# EAGLE board ENERGIS_DispBrd_Rack-PDU_1.0.3 (EAGLE 9.2.1)
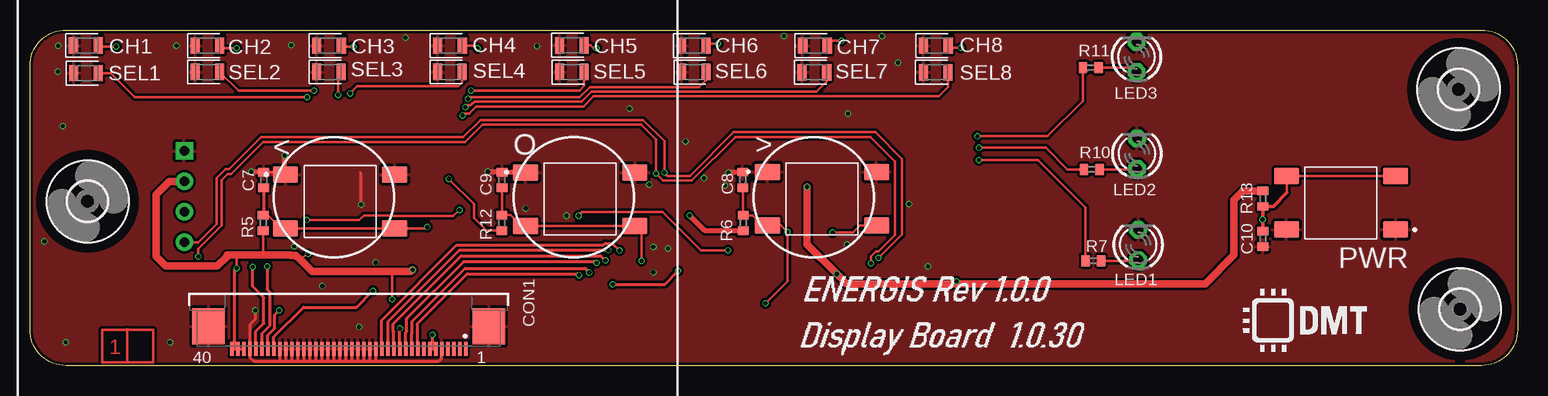
[diagram p0: board, top side]
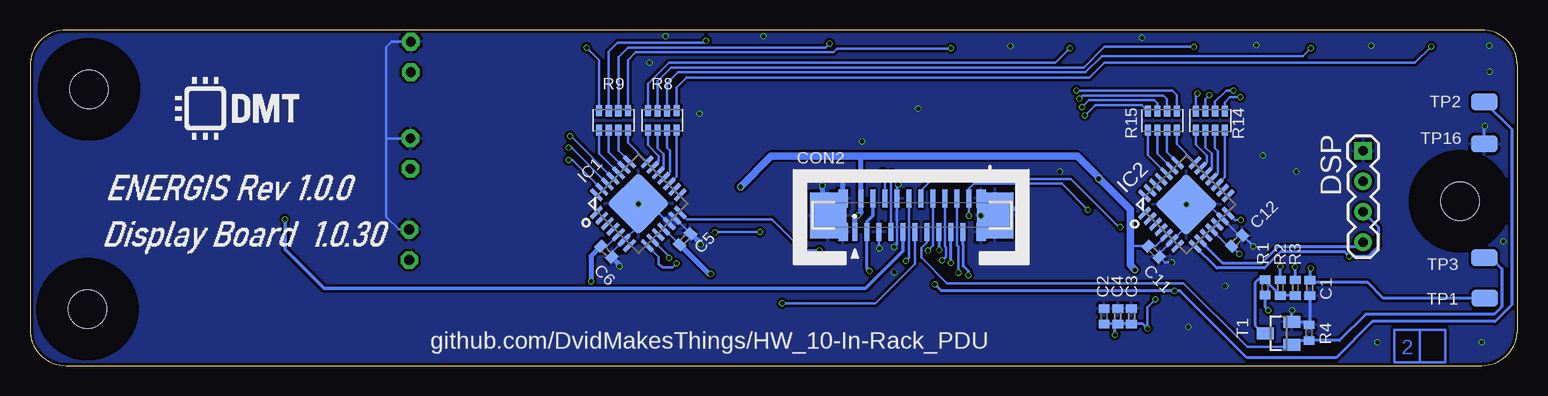
[diagram p1: board, bottom side, seen from below]

Size 124 x 28 mm. Coordinates in mm from the lower left corner, seen from the top.
Outline: 3,28 121,28 arc-90 124,25 124,3 arc-90 121,0 3,0 arc-90 0,3 0,25 arc-90 3,28
Copper layers (1*16): Top 0.035mm / dielectric 1.6mm / Bottom 0.035mm
Design rules "jlcpcb-2layers": minimum track width 5mil, minimum drill 0.3mm, track to track 5mil, track to pad 5mil, pad to pad 5mil, via to via 5mil, smd to smd 5mil, copper to edge 0.2mm, drill to drill 6mil, minimum pad ring 10mil, minimum via ring 3mil, stop-mask expansion 4mil, vias tented up to drill 0mil, thermal gap 10mil
Net classes: 0 default: width 0.2 mm, drill 0.35 mm, clearance 0.191 mm

## Footprints (pad centres in the part's own frame; a part is rotated, then mirrored left to right if it is on the bottom)
PUSHBUTTON-6X6 = smd 2.1 x 1.38: 1 -4.55,2.24; 2 4.55,2.24; 3 -4.55,-2.24; 4 4.55,-2.24
C0402 = smd 0.7 x 0.9: 1 -0.65,0; 2 0.65,0
0402 = smd 0.7 x 0.9: 1 -0.65,0; 2 0.65,0
LED-0805 = smd 0.762 x 1.362: A 1.025,0; C -1.025,0
FPC40_3.5TFT = smd 1.2 x 0.3: 1 24.191,10.261; 2 24.191,9.761; 3 24.191,9.261; 4 24.191,8.761; 5 24.191,8.261; 6 24.191,7.761; 7 24.191,7.261; 8 24.191,6.761; 9 24.191,6.261; 10 24.191,5.761; 11 24.191,5.261; 12 24.191,4.761; 13 24.191,4.261; 14 24.191,3.761; 15 24.191,3.261; 16 24.191,2.761; 17 24.191,2.261; 18 24.191,1.761; 19 24.191,1.261; 20 24.191,0.761; 21 24.191,0.261; 22 24.191,-0.239; 23 24.191,-0.739; 24 24.191,-1.239; 25 24.191,-1.739; 26 24.191,-2.239; 27 24.191,-2.739; 28 24.191,-3.239; 29 24.191,-3.739; 30 24.191,-4.239; 31 24.191,-4.739; 32 24.191,-5.239; 33 24.191,-5.739; 34 24.191,-6.239; 35 24.191,-6.739; 36 24.191,-7.239; 37 24.191,-7.739; 38 24.191,-8.239; 39 24.191,-8.739; 40 24.191,-9.239 | smd 3 x 2.7: Z1 22.331,12.191; Z2 22.331,-11.169
FPC20 = smd 0.4 x 1.5: 1 -4.552,-1.362; 2 -4.052,1.438; 3 -3.552,-1.362; 4 -3.052,1.438; 5 -2.552,-1.362; 6 -2.052,1.438; 7 -1.552,-1.362; 8 -1.052,1.438; 9 -0.552,-1.362; 10 -0.052,1.438; 11 0.448,-1.362; 12 0.948,1.438; 13 1.448,-1.362; 14 1.948,1.438; 15 2.448,-1.362; 16 2.948,1.438; 17 3.448,-1.362; 18 3.948,1.438; 19 4.448,-1.362; 20 4.948,1.438 | smd 3.048 x 3.81: Z0 -6.795,0; Z5 7.112,0 | smd 0.8 x 1.5: Z1 -5.552,-1.362; Z2 -5.552,1.438; Z3 5.948,-1.362; Z4 5.948,1.438
1X4 = drill 0.8 square: 1 0,3.81 | drill 0.8: 2 0,1.27; 3 0,-1.27; 4 0,-3.81
QFN28[6X6]ML = smd 1.27 x 0.35: 1 -2.985,1.95; 2 -2.985,1.3; 3 -2.985,0.65; 4 -2.985,0; 5 -2.985,-0.65; 6 -2.985,-1.3; 7 -2.985,-1.95; 15 2.985,-1.95; 16 2.985,-1.3; 17 2.985,-0.65; 18 2.985,0; 19 2.985,0.65; 20 2.985,1.3; 21 2.985,1.95 | smd 0.35 x 1.27: 8 -1.95,-2.985; 9 -1.3,-2.985; 10 -0.65,-2.985; 11 0,-2.985; 12 0.65,-2.985; 13 1.3,-2.985; 14 1.95,-2.985; 22 1.95,2.985; 23 1.3,2.985; 24 0.65,2.985; 25 0,2.985; 26 -0.65,2.985; 27 -1.3,2.985; 28 -1.95,2.985 | smd 3.7 x 3.7: PAD 0,0
LED3MM = drill 0.813 octagon: A -1.27,0; K 1.27,0
_0603X4-1206 = smd 0.59 x 0.92: A1 -1.2,-0.8; A2 -1.2,0.8; B1 -0.4,-0.8; B2 -0.4,0.8; C1 0.4,-0.8; C2 0.4,0.8; D1 1.2,-0.8; D2 1.2,0.8
SOT23 = smd 1 x 1.4: 1 -0.95,-1.1; 2 0.95,-1.1; 3 0,1.1
TP = smd 2.2 x 1.4: TP 0,0
3,2 = hole 3.2: 0,0

## Placement (x,y rotation side)
<  TS-1002S-04326C  [PUSHBUTTON-6X6]  25.85,13.69 0 top
>  TS-1002S-04326C  [PUSHBUTTON-6X6]  66.03,13.91 0 top
C1  DNI  [C0402]  17.32,6.48 270 bottom
C2  DNI  [C0402]  34.46,4.1 90 bottom
C3  DNI  [C0402]  32.18,4.11 90 bottom
C4  DNI  [C0402]  33.32,4.11 90 bottom
C5  100nF 50V  [0402]  69.4,10.55 45 bottom
C6  100nF 50V  [0402]  75.96,9.51 315 bottom
C7  100nF 50V  [0402]  19.49,15.48 90 top
C8  100nF 50V  [0402]  59.41,15.5 90 top
C9  100nF 50V  [0402]  39.35,15.48 90 top
C10  100nF 50V  [0402]  102.78,10.57 270 top
C11  100nF 50V  [0402]  30.33,9.51 315 bottom
C12  100nF 50V  [0402]  23.38,10.41 45 bottom
CH1  Green  [LED-0805]  4.65,26.71 0 top
CH2  Green  [LED-0805]  14.8,26.69 0 top
CH3  Green  [LED-0805]  24.93,26.69 0 top
CH4  Green  [LED-0805]  35.02,26.69 0 top
CH5  Green  [LED-0805]  45.16,26.71 0 top
CH6  Green  [LED-0805]  55.32,26.69 0 top
CH7  Green  [LED-0805]  65.44,26.68 0 top
CH8  Green  [LED-0805]  75.52,26.68 0 top
CON1  DNI  [FPC40_3.5TFT]  26.06,25.59 270 top
CON2  AFC11-S20ICC-00  [FPC20]  50.67,12.52 0 bottom
DSP  DNI  [1X4]  12.87,14.1 0 bottom
IC1  MCP23017T-E/ML  [QFN28[6X6]ML]  73.29,13.5 45 bottom
IC2  MCP23017T-E/ML  [QFN28[6X6]ML]  27.61,13.44 45 bottom
LED1  GREEN  [LED3MM]  92.39,10.08 90 top
LED2  BLUE  [LED3MM]  92.29,17.68 90 top
LED3  RED  [LED3MM]  92.25,25.75 90 top
O  TS-1002S-04326C  [PUSHBUTTON-6X6]  45.87,13.88 0 top
PWR  TS-1002S-04326C  [PUSHBUTTON-6X6]  109.29,13.58 180 top
R1  DNI  [0402]  21.04,6.52 270 bottom
R2  DNI  [0402]  19.77,6.5 90 bottom
R3  DNI  [0402]  18.52,6.5 90 bottom
R4  10K 1%  [0402]  17.37,2.75 90 bottom
R5  10K 1%  [0402]  19.45,11.9 90 top
R6  10K 1%  [0402]  59.45,11.88 90 top
R7  1K 1%  [0402]  88.64,8.74 0 top
R8  1K 1%  [_0603X4-1206]  71.29,20.45 0 bottom
R9  1K 1%  [_0603X4-1206]  75.35,20.45 0 bottom
R10  1K 1%  [0402]  88.5,16.36 0 top
R11  1K 1%  [0402]  88.42,24.85 0 top
R12  10K 1%  [0402]  39.34,11.9 90 top
R13  10K 1%  [0402]  102.78,13.92 270 top
R14  1K 1%  [_0603X4-1206]  25.61,20.44 0 bottom
R15  1K 1%  [_0603X4-1206]  29.61,20.44 0 bottom
SEL1  Orange  [LED-0805]  4.67,24.4 0 top
SEL2  Orange  [LED-0805]  14.8,24.5 0 top
SEL3  Orange  [LED-0805]  24.92,24.5 0 top
SEL4  Orange  [LED-0805]  35,24.5 0 top
SEL5  Orange  [LED-0805]  45.17,24.49 0 top
SEL6  Orange  [LED-0805]  55.33,24.49 0 top
SEL7  Orange  [LED-0805]  65.39,24.47 0 top
SEL8  Orange  [LED-0805]  75.49,24.47 0 top
T1  BSS138  [SOT23]  19.92,2.7 90 bottom
TP1  TP  [TP]  2.71,5.62 180 bottom
TP2  TP  [TP]  2.76,22 0 bottom
TP3  TP  [TP]  2.77,9.01 0 bottom
TP16  TP  [TP]  2.76,18.5 0 bottom
U$1  [DMT]  109.43,21.42 0 bottom
U$2  [3,2]  119.2,4.7 0 top
U$3  [3,2]  119.08,23.05 0 top
U$4  [3,2]  4.8,13.7 0 top
U$5  [DMT]  103.58,3.74 0 top

## Library data of the parts
< > O PWR = ds_passive; DESCRIPTION: 6mm 4.3mm Round Button 50mA Standing paste 6mm SPST 12V SMD,6x6mm Tactile Switches ROHS; LCSC_PART: C455108
C1-C4 R1-R3 TP1-TP3 TP16 = ds_passive
C5-C12 = ds_capacitors; DESCRIPTION: 50V 100nF X7R ±10% 0402 Multilayer Ceramic Capacitors MLCC - SMD/SMT ROHS; LCSC_PART: C307331
CH1-CH8 = ds_LED; DESCRIPTION: Emerald 0805 LED Indication - Discrete ROHS; LCSC_PART: C2297
CON1 DSP = ds_con
CON2 = ds_con; DESCRIPTION: Drawer Type 20P Single-sided contact points/Vertical Standing paste 0.5mm SMD,P=0.5mm FFC, FPC (Flat Flexible) Connector Assemblies ROHS; LCSC_PART: C11073
IC1 IC2 = ds_ic_peripherals; DATASHEET: https://ww1.microchip.com/downloads/en/devicedoc/20001952c.pdf; DESCRIPTION: 1.7MHz I2C QFN-28-EP(6x6) I/O Expanders ROHS; LCSC_PART: C629439
LED1 = ds_LED; DESCRIPTION: -20℃~+80℃ 20mA 30° 3mm Round Lens 600nm~610nm 610nm 72mW Amber Water Clear Plugin,D=3mm LED Indication - Discrete ROHS; LCSC_PART: C414645
LED2 = ds_LED; DESCRIPTION: 3mm Round Lens Blue Plugin,D=3mm LED Indication - Discrete ROHS; LCSC_PART: C86881
LED3 = ds_LED; DESCRIPTION: -20℃~+80℃ 20mA 30° 3mm Round Lens Red Water Clear Plugin,D=3mm LED Indication - Discrete ROHS; LCSC_PART: C330752
R4-R6 R12 R13 = ds_resistor; DESCRIPTION: 62.5mW Thick Film Resistors 50V ±100ppm/℃ ±1% 10kΩ 0402 Chip Resistor - Surface Mount ROHS; LCSC_PART: C25744
R7 R10 R11 = ds_resistor; DESCRIPTION: 62.5mW Thick Film Resistors 50V ±100ppm/℃ ±1% 1kΩ 0402 Chip Resistor - Surface Mount ROHS; LCSC_PART: C11702
R8 R9 R14 R15 = ds_resistor; DESCRIPTION: 4 ±1% 1kΩ 62.5mW ±200ppm/℃ 0603x4 Resistor Networks, Arrays ROHS; LCSC_PART: C110021
SEL1-SEL8 = ds_LED; DESCRIPTION: 10mA Colorless transparent lens -40℃~+85℃ 598nm~608nm Orange 120° 40mW 0805 LED Indication - Discrete ROHS; LCSC_PART: C434437
T1 = transistor-fet
U$1 U$5 = ds_silkscreen
U$2-U$4 = holes

## Nets
+3V3: C1.1 C2.1 C3.1 C4.1 C5.1 C6.1 C11.1 C12.1 CON1.6 CON1.7 CON1.12 CON1.38 CON1.39 CON1.40 CON2.1 CON2.2 DSP.2 IC1.5 IC1.11 IC2.5 IC2.11 IC2.12 R5.1 R6.1 R12.1 R13.1 TP1.TP
+5V: CON1.33 CON2.3 CON2.4 TP2.TP
GND: <.1 <.2 >.1 >.2 C1.2 C2.2 C3.2 C4.2 C5.2 C6.2 C7.2 C8.2 C9.2 C10.2 C11.2 C12.2 CH1.C CH2.C CH3.C CH4.C CH5.C CH6.C CH7.C CH8.C CON1.5 CON1.16 CON1.17 CON1.18 CON1.19 CON1.20 CON1.21 CON1.22 CON1.23 CON1.24 CON1.25 CON1.26 CON1.27 CON1.28 CON1.29 CON1.30 CON1.31 CON1.32 CON1.37 CON1.Z1 CON1.Z2 CON2.5 CON2.8 CON2.Z0 CON2.Z1 CON2.Z2 CON2.Z3 CON2.Z4 CON2.Z5 DSP.1 IC1.6 IC1.12 IC1.13 IC1.PAD IC2.6 IC2.13 IC2.PAD LED1.K LED2.K LED3.K O.1 O.2 PWR.1 PWR.2 R4.2 SEL1.C SEL2.C SEL3.C SEL4.C SEL5.C SEL6.C SEL7.C SEL8.C T1.2 TP16.TP
I2C0_SCL: CON2.7 DSP.3 IC1.8 IC2.8
I2C0_SDA: CON2.6 DSP.4 IC1.9 IC2.9
KEY_0: <.3 <.4 C7.1 CON2.12 R5.2
KEY_1: >.3 >.4 C8.1 CON2.11 R6.2
KEY_2: C9.1 CON2.10 O.3 O.4 R12.2
KEY_3: C10.1 CON2.9 PWR.3 PWR.4 R13.2
LCD_BL: CON2.13 R4.1 T1.1 TP3.TP
LCD_CS: CON1.9 CON2.19
LCD_DC: CON1.10 CON2.18
LCD_MISO: CON1.14 CON2.15
LCD_MOSI: CON1.13 CON2.16
LCD_RES: CON1.15 CON2.14
LCD_SCLK: CON1.11 CON2.17
MCP_LCD_RST: CON2.20 IC1.14 IC2.14
N$2: CON1.35 R2.2
N$3: CON1.36 R3.2
N$4: R1.1 R2.1 R3.1 T1.3
N$5: CON1.34 R1.2
N$8: IC2.17 R14.D1
N$9: IC2.18 R14.C1
N$10: IC2.19 R14.B1
N$11: IC2.20 R14.A1
N$12: IC2.21 R15.D1
N$13: IC2.22 R15.C1
N$14: IC2.23 R15.B1
N$15: IC2.24 R15.A1
N$16: R14.D2 SEL1.A
N$17: R14.C2 SEL2.A
N$18: R14.B2 SEL3.A
N$19: R14.A2 SEL4.A
N$20: R15.D2 SEL5.A
N$21: R15.C2 SEL6.A
N$22: R15.B2 SEL7.A
N$23: R15.A2 SEL8.A
N$46: IC1.26 R10.1
N$47: IC1.27 R7.1
N$48: IC1.25 R11.1
N$50: IC1.17 R8.D1
N$51: IC1.18 R8.C1
N$52: IC1.19 R8.B1
N$53: IC1.20 R8.A1
N$54: IC1.21 R9.D1
N$55: IC1.22 R9.C1
N$56: IC1.23 R9.B1
N$57: IC1.24 R9.A1
N$58: CH1.A R8.D2
N$59: CH2.A R8.C2
N$60: CH3.A R8.B2
N$61: CH4.A R8.A2
N$62: CH5.A R9.D2
N$63: CH6.A R9.C2
N$64: CH7.A R9.B2
N$65: CH8.A R9.A2
N$66: LED3.A R11.2
N$67: LED2.A R10.2
N$68: LED1.A R7.2

## Tracks (layer width: path | path; a pad name or v marks a point on that pad's centre or on a via)
+3V3  (via drill 0.35)
  Top 0.203: 35.02,15.58 v34.91,15.58 37.02,13.47 37.02,12.31 38.08,11.25 R12.1 | v23.17,9.31 23.07,9.31 22.56,8.8 | R5.1 19.45,9.3 19.37,9.22 | v17.23,8.12 17.23,9.21 17.22,9.22 | v30.19,5.51 30.19,7.84
  Top 0.254: CON1.40 17.05,1.4 | 17.05,1.4 CON1.39 CON1.38 | 17.05,1.4 17.05,7.94 v17.23,8.12 | CON1.7 33.55,1.4 | 33.55,1.4 CON1.6 | CON1.12 30.82,3.07 v30.84,3.09 | 33.55,1.4 v33.55,2.57
  Top 0.406: R6.1 56.28,11.23 v54.98,12.53 | v77.24,7.01 77.24,6.85 77.22,6.83
  Top 0.61: DSP.2 11.62,15.37 10.52,14.27 10.52,9.12 11.33,8.31 15.62,8.31 16.43,9.12 16.43,9.22 17.22,9.22 19.37,9.22 21.68,9.22 21.71,9.19 22.17,9.19 22.56,8.8 23.52,7.84 30.19,7.84 31.71,7.84 31.85,7.98 v31.89,7.98 | v64.78,14.91 64.78,10.1 v67.25,7.63 68.05,6.83 77.22,6.83 97.98,6.83 100.37,9.22 100.37,13.83 101.11,14.57 R13.1
  Bottom 0.203: IC1.5 75.9,9.97 C6.1 | IC1.11 71.15,11.39 C5.1 | IC2.5 30.16,9.97 C11.1 32.26,9.97 32.29,9.94 | IC2.12 IC2.11 24.12,9.95 C12.1 23.2,9.31 v23.17,9.31 | v30.84,3.09 30.84,4.86 v30.19,5.51
  Bottom 0.254: v17.23,8.12 17.32,8.03 C1.1 17.12,6.93 12.49,6.93 11.18,5.62 TP1.TP | v30.84,3.09 31.21,3.46 C3.1 C4.1 33.48,3.46 | 33.48,3.46 C2.1 | v33.55,2.57 33.55,3.39 33.48,3.46
  Bottom 0.406: 54.71,17.46 54.72,17.45 CON2.2 54.72,12.79 v54.98,12.53 55.22,12.29 CON2.1 | C5.1 67.39,7.63 v67.25,7.63 | C6.1 77.24,9.15 v77.24,7.01
  Bottom 0.61: v31.89,7.98 32.29,8.38 32.29,9.94 32.29,13.04 34.83,15.58 v34.91,15.58 34.91,15.69 36.69,17.46 54.71,17.46 62.23,17.46 v64.78,14.91
+5V  (via drill 0.35)
  Top 0.254: CON1.33 20.32,2.39 22.8,4.87 27.21,4.87 v28.58,6.24 v28.59,6.24 | v48.58,6.78 52.92,6.78 v54.02,7.88
  Bottom 0.254: v48.58,6.78 48.04,6.24 v28.59,6.24 28.14,6.24 22.55,0.65 15.12,0.65 12.1,3.67 1.87,3.67 0.47,5.07 0.47,19.71 TP2.TP | v54.02,7.88 54.22,8.08 CON2.3
  Bottom 0.305: CON2.3 54.22,12.02 53.72,12.52 CON2.4
GND  (via drill 0.35)
  Top 0.254: 20.82,0.36 18.66,0.36 18.32,0.7 CON1.37 18.32,3.4 18.79,3.87 v18.79,4.6 | 20.82,0.36 21.26,0.36 | 21.26,0.36 21.79,0.36 | 21.79,0.36 22.24,0.36 | 22.24,0.36 22.75,0.36 | 22.75,0.36 23.28,0.36 | 23.28,0.36 23.77,0.36 | 23.77,0.36 24.31,0.36 | 24.31,0.36 24.77,0.36 | 24.77,0.36 25.26,0.36 | 25.26,0.36 25.77,0.36 | 25.77,0.36 26.27,0.36 | 26.27,0.36 26.74,0.36 | 26.74,0.36 27.29,0.36 | 27.29,0.36 27.84,0.36 | 27.84,0.36 28.33,0.36 | 28.33,0.36 28.83,0.36 | 28.83,0.36 34.06,0.36 34.32,0.63 CON1.5 | CON1.16 28.82,0.38 28.83,0.36 | CON1.17 28.32,0.38 28.33,0.36 | CON1.18 27.82,0.39 27.84,0.36 | CON1.19 27.32,0.4 27.29,0.36 | CON1.20 26.82,0.45 26.74,0.36 | CON1.21 26.32,0.42 26.27,0.36 | CON1.22 25.82,0.42 25.77,0.36 | CON1.23 25.32,0.43 25.26,0.36 | CON1.24 24.82,0.42 24.77,0.36 | CON1.25 24.32,0.38 24.31,0.36 | CON1.26 23.82,0.42 23.77,0.36 | CON1.27 23.32,0.41 23.28,0.36 | CON1.28 22.82,0.44 22.75,0.36 | CON1.29 22.32,0.45 22.24,0.36 | CON1.30 21.82,0.4 21.79,0.36 | CON1.31 21.32,0.43 21.26,0.36 | CON1.32 20.82,0.37 20.82,0.36 | 27.56,16.08 27.56,13.49 IC2.PAD | C7.2 21.27,16.13
  Top 0.305: C10.2
  Top 0.406: C8.2 59.46,16.1 v58.23,16.1 v58.22,16.09 | 41.31,16.13 C9.2 38.2,16.13 v38.16,16.17 | 21.27,16.13 21.22,16.17 v21.22,17.51 | C7.2 18.49,16.13 v18.45,16.17
  Bottom 0.203: LED3.K 93.84,27.02 94.31,26.55 94.31,19.01 | 94.31,19.01 94.31,12.41 93.25,11.35 LED1.K | LED2.K 94.25,18.95 94.31,19.01 | C6.2 75.5,9.45 IC1.6 73.29,11.66 v73.29,13.48 72.35,13.48 IC1.12 IC1.13 70.23,12.31 C5.2 | C12.2 23.2,10.87 IC2.13 25.77,13.44 IC2.PAD 27.61,11.6 IC2.6 29.87,9.34 C11.2 29.41,8.59 v28.83,8.59 | CON2.5 53.22,9.8 v53.18,9.76 | v51.62,15.1 51.72,15 CON2.8 51.72,10.14 v51.96,9.9
  Bottom 0.254: v18.79,4.6 18.82,4.57 T1.2 17.62,3.65 R4.2 17.32,3.45 C1.2 | TP16.TP 2.76,19.94 v2.72,19.98 | C12.2 22.02,9.97 v22.02,9.94
  Bottom 0.406: C5.2 68.1,10.17 v68.1,10.09 | C6.2 74.86,8.4 v74.86,8.28 | IC1.PAD v73.29,13.48 | v56.19,15.63 56.22,15.6 CON2.Z2 CON2.Z1 | CON2.Z0 57.97,14.99 v57.94,15.02 | CON2.Z4 v44.72,12.5 CON2.Z3 | CON2.Z5 42.45,13.12 v41.33,13.12
  other vias: 27.61,13.44 2.99,1.94 11.67,1.94 1.2,10.35 51.96,7.79 72.35,25.26 71.02,27.49 62.86,27.48 68.19,21.01 54.66,18.7 49.97,21.43 42.27,26.66 31.3,27.36 21.78,26.73 12.21,26.68 2.37,26.68 2.33,24.51 24.37,6.63 27.43,3.22
  pour Bottom (isolate 0.203): -2.3,30.18 125.2,30.18 125.2,-25.28 -2.3,-25.28
  pour Top (isolate 0.203): -1.5,29.55 126.65,29.55 126.65,-24.68 -1.5,-24.68
I2C0_SCL  (via drill 0.35)
  Top 0.203: v14.04,9.11 14.04,9.74 15.96,11.67 15.96,15.47 16.49,16 16.75,16 19.42,18.67 36.28,18.67 37.72,20.11 50.94,20.11 52.18,18.87 v52.18,16.01 52.75,15.44 55.16,15.44 58.79,19.07 70.07,19.07 72.11,17.03 72.11,10.9 70.73,9.52 70.52,9.52 70.11,9.12 v70.11,8.52
  Bottom 0.203: CON2.7 52.22,15.97 v52.18,16.01 | v70.11,8.52 70.44,8.19 71.29,8.19 71.6,8.5 71.6,9.06 IC1.8
  Bottom 0.254: DSP.3 11.62,11.58 11.62,9.94 12.45,9.11 v14.04,9.11 14.42,9.49 19.77,9.49 21.12,8.14 25.06,8.14 IC2.8
I2C0_SDA  (via drill 0.35)
  Top 0.203: DSP.4 14.03,10.29 15.57,11.83 15.57,15.63 16.33,16.39 16.59,16.39 19.26,19.06 36.12,19.06 37.56,20.5 51.1,20.5 52.88,18.72 v52.88,16.1 53.15,15.83 55,15.83 58.63,19.46 70.47,19.46 72.68,17.25 72.68,10.92 v70.74,8.98
  Bottom 0.203: CON2.6 52.72,15.94 v52.88,16.1 | v70.74,8.98 70.74,9.12 IC1.9
  Bottom 0.254: IC2.9 24.59,8.58 21.3,8.58 19.95,9.93 13.23,9.93 DSP.4
KEY_0  (via drill 0.35)
  Top 0.203: R5.2 19.83,12.55 20.48,11.9 20.85,11.9 <.3 <.4 33.02,11.45 v33.12,11.55
  Top 0.254: C7.1 19.49,12.59 R5.2
  Bottom 0.203: CON2.12 49.72,14.62 48.77,15.57 37.25,15.57 33.23,11.55 v33.12,11.55
KEY_1  (via drill 0.35)
  Top 0.203: 61.33,5.23 v61.3,5.2 63.14,7.04 v63.14,11.14 62.61,11.67 >.3 61.11,11.67 60.25,12.53 R6.2 59.45,14.81 C8.1 | v66.91,11.09 68.62,11.09 69.2,11.67 >.4
  Bottom 0.203: CON2.11 50.22,8.47 53.51,5.18 61.28,5.18 v61.3,5.2 | v63.14,11.14 66.89,11.14 66.91,11.12 v66.91,11.09
KEY_2  (via drill 0.35)
  Top 0.203: C9.1 R12.2 40.07,12.55 40.79,11.83 41.13,11.83 O.3 O.4 50.97,11.09 v50.97,8.73
  Bottom 0.203: CON2.10 50.72,8.98 v50.97,8.73
KEY_3  (via drill 0.35)
  Top 0.203: 104.78,14.42 104.78,15.78 PWR.4 PWR.3
  Top 0.305: C10.1 102.78,12.16 v102.75,12.19 102.75,13.24 R13.2 103.63,13.27 104.78,14.42
  Bottom 0.305: CON2.9 51.22,9.57 54.37,6.42 99.5,6.42 102.75,9.67 v102.75,12.19
LCD_BL
  Bottom 0.203: CON2.13 49.22,10.28 49.68,9.81 49.68,9 47.55,6.87 27.85,6.87 22.53,1.55 19.02,1.55 T1.1
  Bottom 0.254: T1.1 18.47,2.1 R4.1 14.85,2.1 12.66,4.29 1.94,4.29 1.32,4.91 1.32,4.97 1.29,4.99 1.29,8.07 2.02,8.8 2.56,8.8 TP3.TP
LCD_CS  (via drill 0.35)
  Top 0.254: CON1.9 32.32,3.52 36.46,7.66 45.65,7.66 v45.77,7.54
  Bottom 0.254: v45.77,7.54 45.77,7.88 46.2,8.31 46.2,10.09 46.22,10.12 CON2.19
LCD_DC  (via drill 0.35)
  Top 0.254: CON1.10 31.82,2.64 31.85,2.67 31.85,3.68 36.27,8.1 46.3,8.1 46.62,7.79 v46.62,7.75
  Bottom 0.203: v46.62,7.75 46.62,9.92 46.72,10.02 CON2.18
LCD_MISO  (via drill 0.35)
  Top 0.254: v48.2,9.63 48.17,9.6 35.76,9.6 29.82,3.66 CON1.14
  Bottom 0.254: CON2.15 48.22,9.65 v48.2,9.63
LCD_MOSI  (via drill 0.35)
  Top 0.254: CON1.13 30.32,2.8 30.27,2.85 30.27,3.48 35.94,9.15 47.57,9.15 v47.96,8.76
  Bottom 0.203: CON2.16 47.72,9.92 47.66,9.85 47.66,9.06 v47.96,8.76
LCD_RES  (via drill 0.35)
  Top 0.254: CON1.15 29.32,3.79 35.58,10.04 47.81,10.04 47.96,10.2 48.53,10.2 v49.14,9.59
  Bottom 0.203: v49.14,9.59 48.73,10 CON2.14
LCD_SCLK  (via drill 0.35)
  Top 0.254: CON1.11 31.32,2.77 31.41,2.85 31.41,3.93 36.14,8.66 47.13,8.66 v47.23,8.56
  Bottom 0.254: v47.23,8.56 v47.22,8.57 CON2.17
MCP_LCD_RST  (via drill 0.35)
  Top 0.203: v58.19,9.62 55.92,9.62 52.74,12.8 46.02,12.8 v45.72,12.5 | v23.06,12.13 27.45,12.13 27.84,12.52 30.16,12.52 30.2,12.48 35.29,12.48 v35.8,12.99
  Bottom 0.203: IC1.14 69.23,12.2 62.15,12.2 59.57,9.62 v58.19,9.62 | v45.72,12.5 CON2.20 45.72,14.76 45.3,15.18 37.99,15.18 v35.8,12.99 | IC2.14 23.54,12.13 v23.06,12.13
N$1
  Top 0.203: 8.12,0.28 10.26,0.28 10.26,3 6.04,3 6.04,0.28 8.12,0.28 | 8.12,0.28 8.12,3.01 8.13,3.01
N$2  (via drill 0.35)
  Top 0.254: v19.76,8.28 19.76,6.37 19.97,6.16 19.97,3.3 19.32,2.65 CON1.35
  Bottom 0.254: R2.2 v19.77,8.27 v19.76,8.28
N$3  (via drill 0.35)
  Top 0.254: CON1.36 18.82,2.85 19.49,3.52 19.49,5.68 18.55,6.62 v18.55,8.22
  Bottom 0.254: v18.55,8.22 18.55,7.18 R3.2
N$4
  Bottom 0.254: T1.3 21.23,2.7 21.89,3.36 21.89,6.88 21.6,7.17 R1.1 21.04,7.12 R2.1 R3.1
N$5  (via drill 0.35)
  Top 0.254: CON1.34 19.82,2.52 20.41,3.12 20.41,4.24 v20.77,4.6
  Bottom 0.254: v20.77,4.6 21.04,4.87 R1.2
N$6
  Bottom 0.203: 8.13,3 10.26,3 10.26,0.27 8.13,0.27 | 8.13,0.27 6.04,0.27 6.04,3 8.13,3 | 8.13,3 8.13,0.27
N$8
  Bottom 0.203: R14.D1 24.41,15.72 IC2.17
N$9
  Bottom 0.203: IC2.18 24.97,16.08 24.97,17.9 25.21,18.14 R14.C1
N$10
  Bottom 0.203: R14.B1 26.01,18.21 25.5,17.69 25.5,16.47 IC2.19
N$11
  Bottom 0.203: R14.A1 26.81,18.45 25.89,17.53 25.89,17 IC2.20
N$12
  Bottom 0.203: IC2.21 28.41,18.46 R15.D1
N$13
  Bottom 0.203: IC2.22 29.21,17.8 R15.C1
N$14
  Bottom 0.203: IC2.23 30.01,17.68 R15.B1
N$15
  Bottom 0.203: IC2.24 30.81,17.56 R15.A1
N$16  (via drill 0.35)
  Top 0.203: SEL1.A 6.73,24.4 8.74,22.39 v23.1,22.39
  Bottom 0.203: v23.1,22.39 23.96,22.39 24.41,21.94 R14.D2
N$17  (via drill 0.35)
  Top 0.203: v23.67,22.94 17.39,22.94 SEL2.A
  Bottom 0.203: R14.C2 25.21,22.01 24.28,22.94 v23.67,22.94
N$18  (via drill 0.35)
  Top 0.203: v25.68,22.58 25.68,24.23 SEL3.A
  Bottom 0.203: R14.B2 26.01,22.25 v25.68,22.58
N$19  (via drill 0.35)
  Top 0.203: v26.68,22.7 27.29,23.31 35.67,23.31 36.02,23.66 SEL4.A
  Bottom 0.203: R14.A2 26.81,22.57 v26.68,22.7
N$20  (via drill 0.35)
  Top 0.203: v36.76,22.95 45.81,22.95 46.2,23.34 SEL5.A
  Bottom 0.203: R15.D2 28.41,22.56 28.77,22.92 36.73,22.92 v36.76,22.95
N$21  (via drill 0.35)
  Top 0.203: v36.52,22.26 36.67,22.41 45.82,22.41 46.67,23.25 55.79,23.25 56.35,23.81 SEL6.A
  Bottom 0.203: R15.C2 29.21,22.23 29.51,22.53 36.25,22.53 v36.52,22.26
N$22  (via drill 0.35)
  Top 0.203: v36.3,21.56 36.45,21.71 36.74,21.71 37.04,22.01 45.99,22.01 46.83,22.86 65.57,22.86 66.42,23.7 SEL7.A
  Bottom 0.203: R15.B2 30.01,21.89 30.25,22.13 35.73,22.13 v36.3,21.56
N$23  (via drill 0.35)
  Top 0.203: v36.06,20.87 36.21,21.02 36.61,21.02 37.21,21.62 46.15,21.62 46.99,22.46 75.76,22.46 76.52,23.22 SEL8.A
  Bottom 0.203: R15.A2 31.31,21.74 35.19,21.74 v36.06,20.87
N$46  (via drill 0.35)
  Top 0.203: v79.1,18.17 84.67,18.17 86.48,16.36 R10.1
  Bottom 0.203: IC1.26 78.88,18.17 v79.1,18.17
N$47  (via drill 0.35)
  Top 0.203: v79.1,17.14 84.02,17.14 87.99,13.17 R7.1
  Bottom 0.203: IC1.27 78.76,17.14 v79.1,17.14
N$48  (via drill 0.35)
  Top 0.203: v78.98,19.13 84.83,19.13 87.77,22.07 R11.1
  Bottom 0.203: IC1.25 78.92,19.13 v78.98,19.13
N$50
  Bottom 0.203: IC1.17 70.09,15.78 R8.D1
N$51
  Bottom 0.203: R8.C1 70.89,18.17 70.65,17.93 70.65,16.14 IC1.18
N$52
  Bottom 0.203: IC1.19 71.17,16.54 71.17,17.64 71.69,18.16 R8.B1
N$53
  Bottom 0.203: R8.A1 72.49,18.39 71.59,17.49 71.59,17.04 IC1.20
N$54
  Bottom 0.203: IC1.21 74.15,18.59 R9.D1
N$55
  Bottom 0.203: IC1.22 74.95,17.92 R9.C1
N$56
  Bottom 0.203: IC1.23 75.75,17.8 R9.B1
N$57
  Bottom 0.203: IC1.24 76.55,17.69 R9.A1
N$58  (via drill 0.35)
  Top 0.203: v7.2,26.62 5.76,26.62 CH1.A
  Bottom 0.203: R8.D2 70.09,23.19 69.27,24.01 35.7,24.01 34.44,25.27 8.55,25.27 v7.2,26.62
N$59  (via drill 0.35)
  Top 0.203: v17.24,26.47 16.05,26.47 CH2.A
  Bottom 0.203: R8.C2 70.89,23.55 69.97,24.47 36,24.47 34.65,25.83 17.88,25.83 v17.24,26.47
N$60  (via drill 0.35)
  Top 0.203: v26.99,26.59 26.06,26.59 CH3.A
  Bottom 0.203: R8.B2 71.69,23.74 70.57,24.87 36.16,24.87 34.44,26.59 v26.99,26.59
N$61  (via drill 0.35)
  Top 0.203: v37.3,26.47 37.08,26.69 CH4.A
  Bottom 0.203: R8.A2 72.49,23.5 70.73,25.26 38.51,25.26 v37.3,26.47
N$62  (via drill 0.35)
  Top 0.203: v47.24,26.48 46.98,26.48 46.74,26.71 CH5.A
  Bottom 0.203: R9.D2 74.15,25.5 73.5,26.15 57.02,26.15 56.73,26.43 47.29,26.43 v47.24,26.48
N$63  (via drill 0.35)
  Top 0.203: v57.35,26.87 56.52,26.87 CH6.A
  Bottom 0.203: R9.C2 74.95,25.74 74.15,26.54 57.68,26.54 v57.35,26.87
N$64  (via drill 0.35)
  Top 0.203: v67.65,27.09 66.58,27.09 66.46,26.97 CH7.A
  Bottom 0.203: R9.B2 75.75,26.2 75.01,26.94 67.8,26.94 v67.65,27.09
N$65  (via drill 0.35)
  Top 0.203: v77.59,26.52 76.71,26.52 CH8.A
  Bottom 0.203: R9.A2 76.55,25.48 v77.59,26.52
N$66
  Top 0.203: R11.2 91.88,24.85 LED3.A
N$67
  Top 0.203: R10.2 92.24,16.36 LED2.A
N$68
  Top 0.203: R7.2 92.32,8.74 LED1.A

## Text on the board
Top: 1
Bottom: 2
bPlace: github.com/DvidMakesThings/HW_10-In-Rack_PDU